# Altium PCB Zoom Camera Controller V2.0.PcbDoc
Units mil, origin at the board's own origin, x right, y up, seen from the top; angles counter-clockwise.
Board outline 1377.95 x 1377.95 mil, 2 copper layers (Top Layer, Bottom Layer); 22 components, 37 nets, 177 pads, 40 vias.
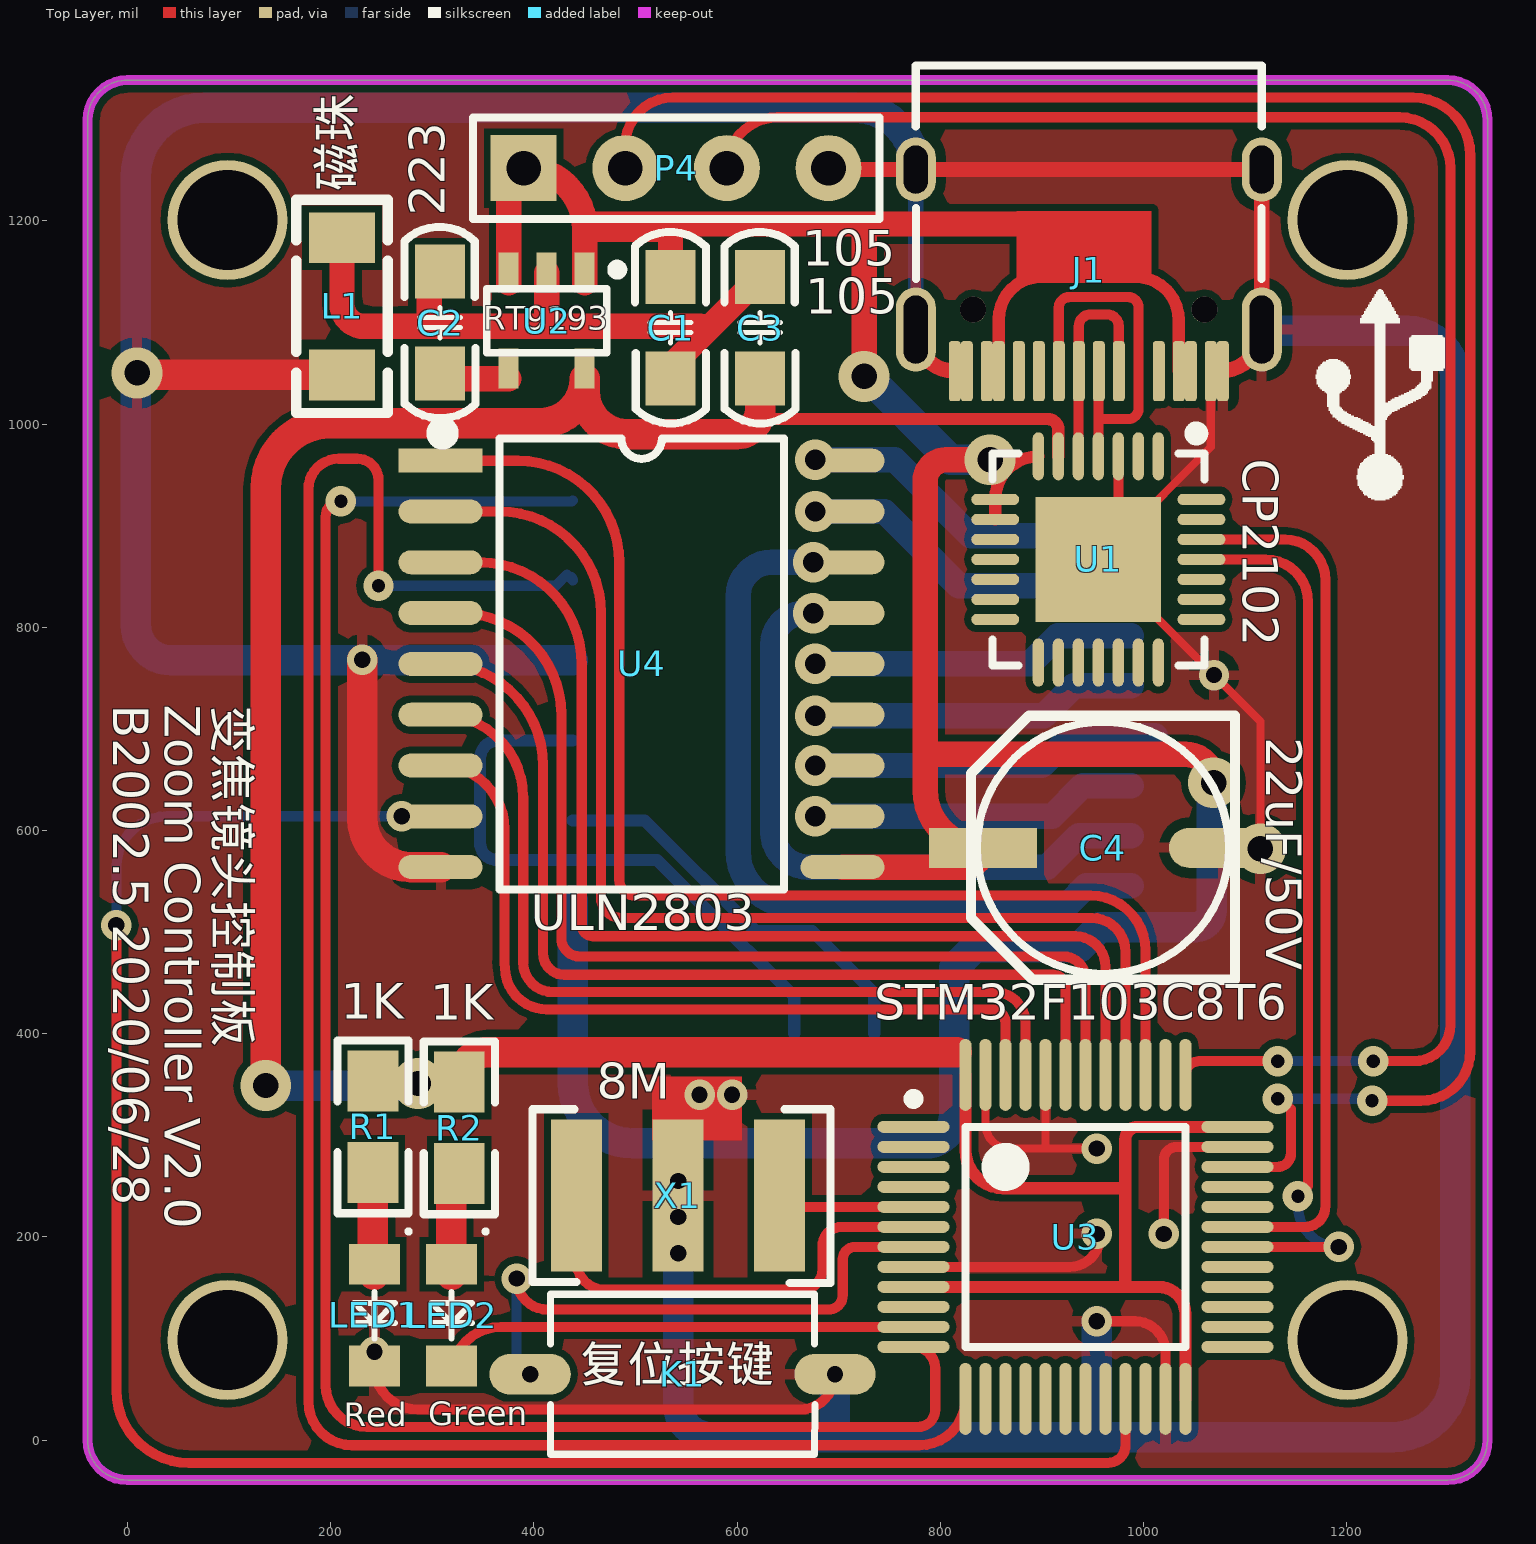
[diagram p0: Top Layer view]
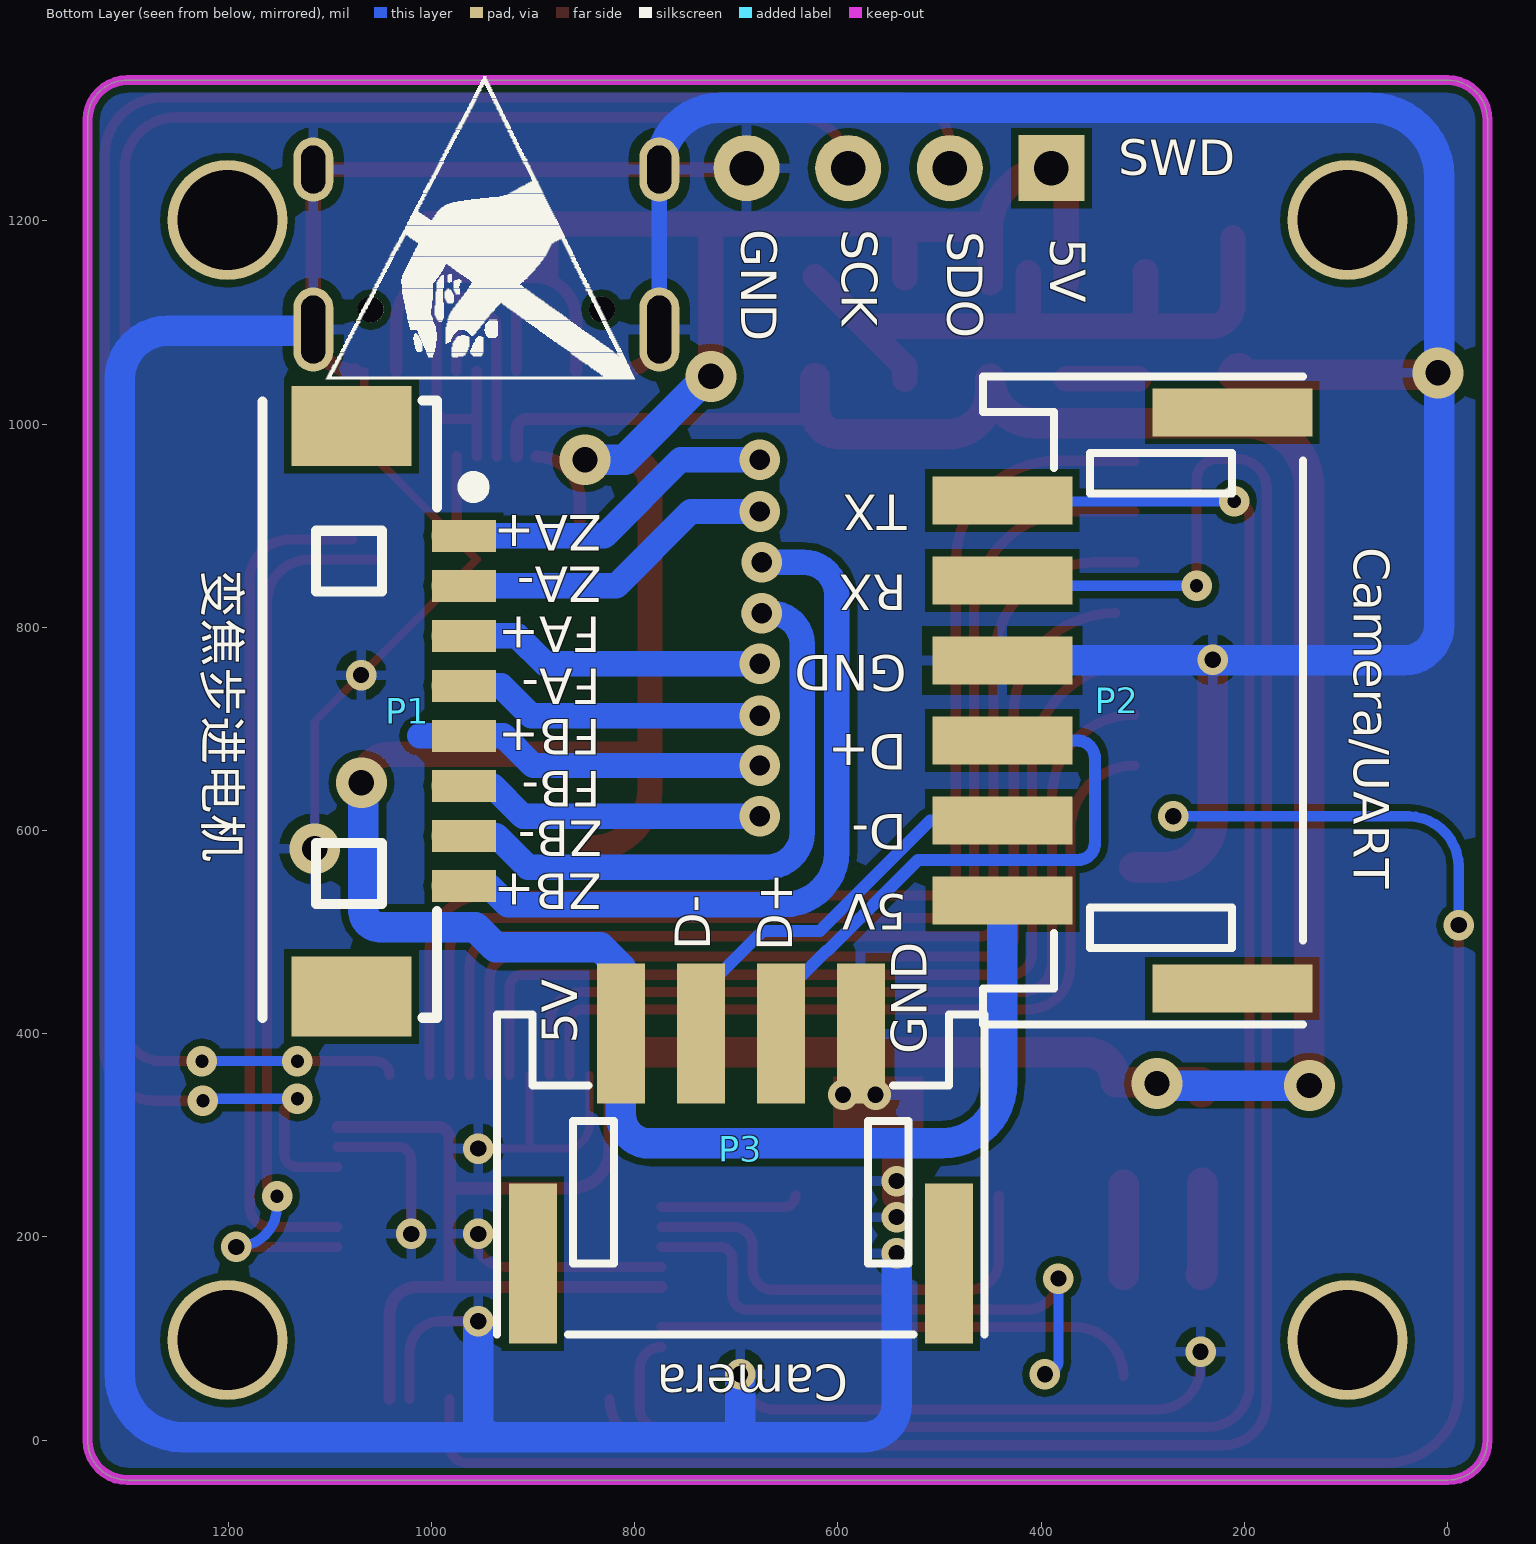
[diagram p1: Bottom Layer view, seen from below]
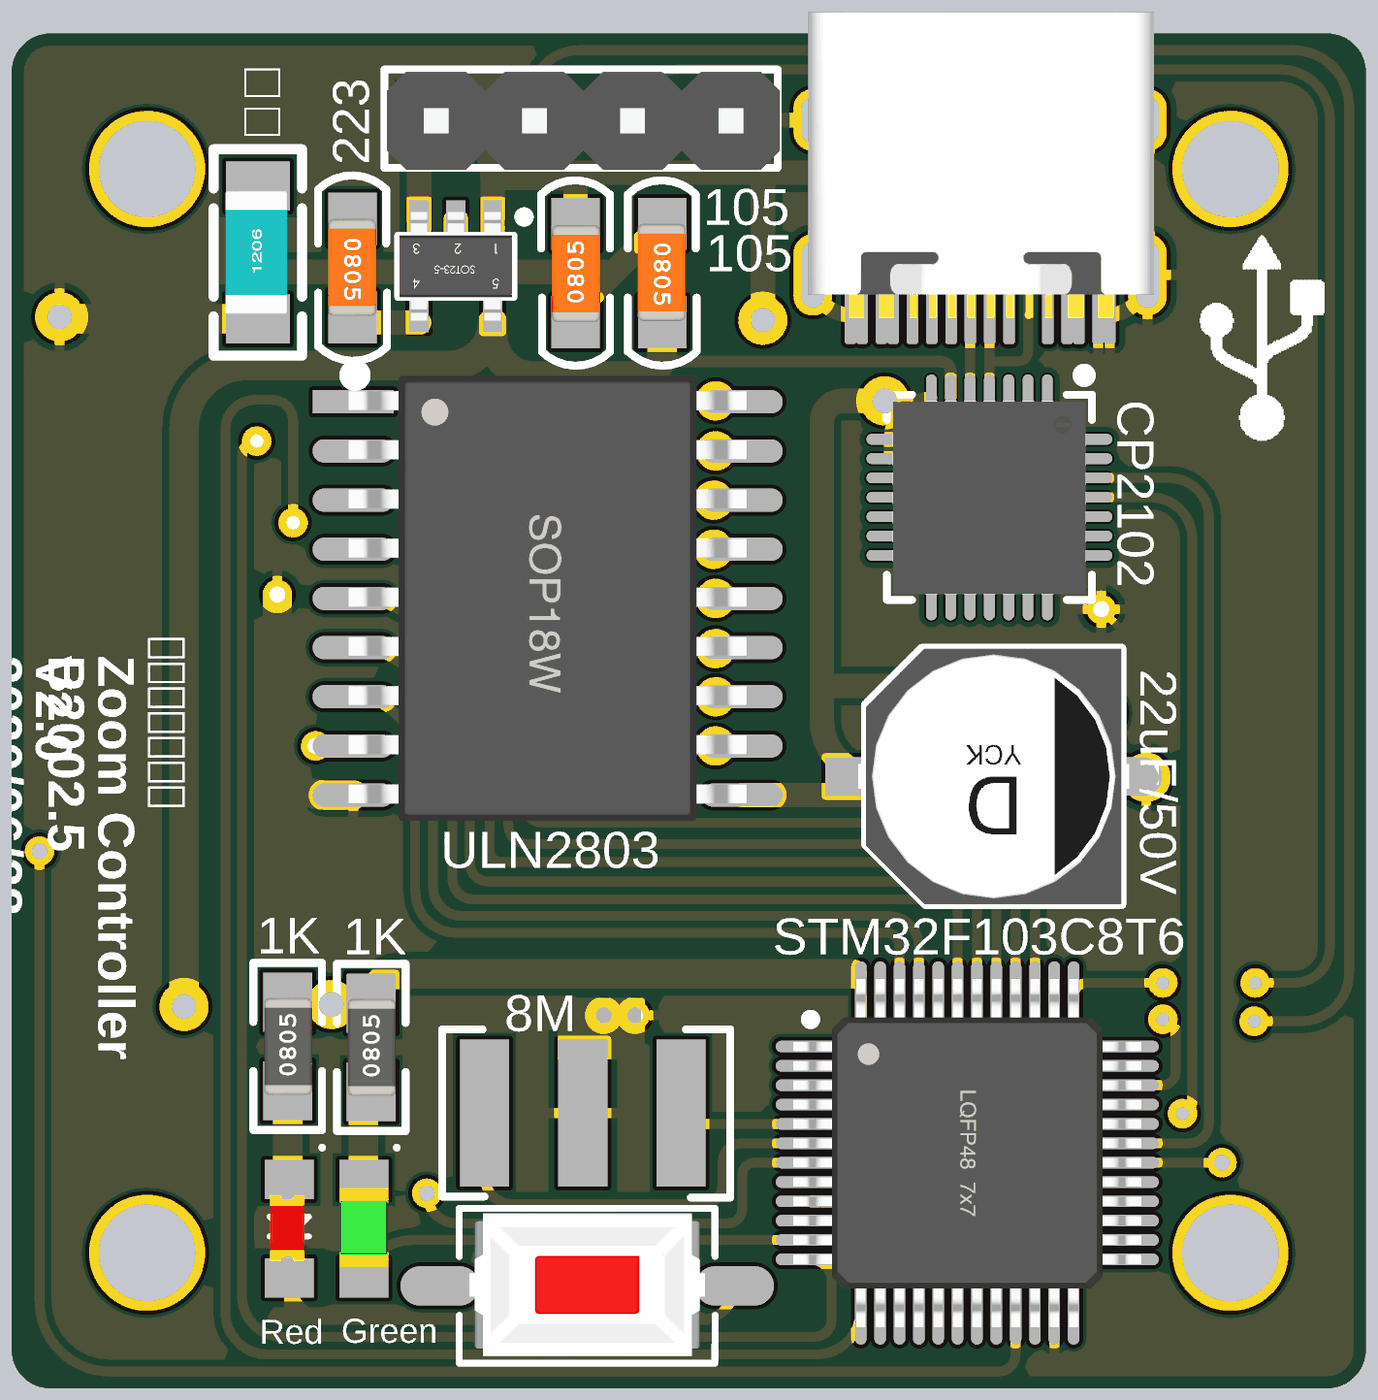
[diagram p2: 3D render of the assembled board from above, using the file's embedded part models]
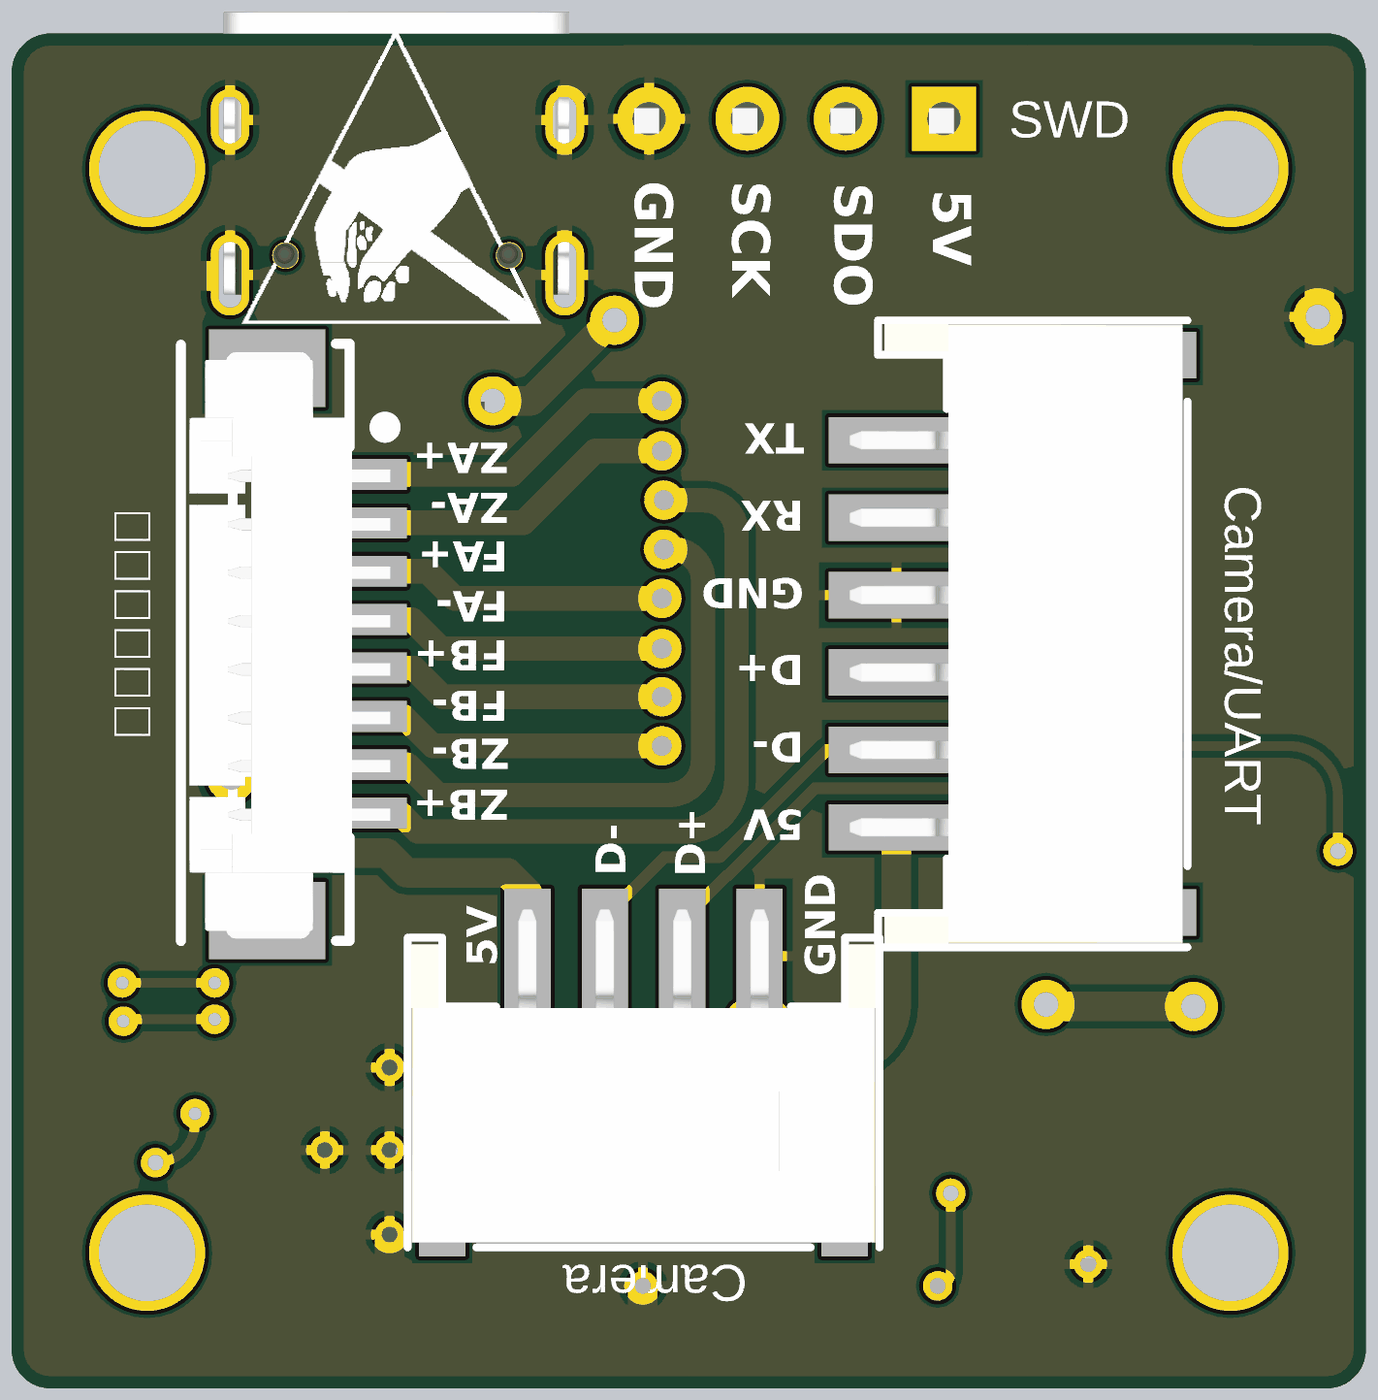
[diagram p3: 3D render of the assembled board from below, using the file's embedded part models]

## Layer stack, top to bottom
Top Solder: solder mask 0.4, Solder Resist, Dk 3.5
Top Layer: signal copper 1.4
Dielectric 1: dielectric 12.6, FR-4, Dk 4.8
Bottom Layer: signal copper 1.4
Bottom Solder: solder mask 0.4, Solder Resist, Dk 3.5

## Board outline
-39.37,0 -39.37,1299.21 cw(c0,1299.21) 0,1338.58 1299.21,1338.58 cw(c1299.21,1299.21) 1338.58,1299.21 1338.58,0 cw(c1299.21,0) 1299.21,-39.37 0,-39.37 cw(c0,0)

## Design rules (kind name [scope] priority, off if disabled: settings)
Clearance [All] p1: gap=7
ComponentClearance [All] p1: gap=0 collisioncheckmode=3 verticalgap=0 showdistances=FALSE
PolygonConnect [All] p1: connectstyle=Relief reliefconductorwidth=10 reliefentries=4 polygonreliefangle="90 Angle" airgapwidth=10
RoutingVias [All] p1: holewidth=28 width=50 viastyle="Through Hole" minholewidth=28 minwidth=50 maxholewidth=28 maxwidth=50
SolderMaskExpansion [All] p1: expansion=4
Width [All] p1: maxlimit=50 minlimit=8 preferedwidth=20
29 further rules are at their usual default settings.

## Components (designator, comment, footprint, x,y, rotation, side; value= is the part's Value field where it differs from the comment)
C1 "105" 0805C 530,1045.97 r90 top
C2 "223" 0805C 312,1149 r270 top
C3 "105" 0805C 627,1144 r270 top
C4 "22uF/50V" "CM D(6.3*5.4)" 959,583 r180 top
J1 "TypeC" "TYPE-C 16P" 940,1185 r90 top
K1 "复位按键" 贴片按键 402,62 r0 top
L1 "磁珠" 1206L 213,1050 r90 top
LED1 "Red" 0805LED(RED) 248,170 r270 top
LED2 "Green" 0805LED(GREEN) 321,171 r270 top
P1 "变焦步进电机" MX1.25WS-8P 1089,695 r90 bottom
P2 "Camera/UART" PH2.0WS-6P 305,738 r90 bottom
P3 "Camera" PH2.0WS-4P 686,251 r180 bottom locked
P4 "SWD" "Header 4" 389,1251 r90 top
R1 "1K" 0805R 242,257 r90 top
R2 "1K" 0805R 327,256 r90 top
U1 "CP2102" QFN-28 1031,942 r270 top
U2 "RT9193" SOT23-5 448,1151 r180 top
U3 "STM32F103C8T6" LQFP-48 935,200 r0 top locked
U4 "ULN2803" SOP18W_M 507,768 r0 top
X1 "8M" 三脚贴片8M晶振 642,243 r270 top
? "" LOGO_USB 1245,1028 r90 top
? "" LOGO_防静电 943,1192 r180 bottom

## Footprints (in the part's own frame and the unit in brackets; to place one, negate y for a bottom-side part, rotate by r counter-clockwise, add the part's x,y. Pads: shape width x height; smd on the part's side, far side on the other; paste and mask are expansions set on the pad)
0805C [mm]
  rect 1.35x1.25 smd: 1(-0.025,-0.112) 2(2.515,-0.112)
  silkscreen extent -1.15,-1 3.64,0.78, body extent -0.03,-0.75 2.48,0.5, height 0.79
0805LED(GREEN) [mil]
  rect 40x50 smd: 1(-2,-2) 2(98,-2)
  silkscreen extent -36,-22 71,33, body extent 7,-27 87,23, height 43
0805LED(RED) [mil]
  rect 40x50 smd: 1(-2.98,-4.95) 2(97.02,-4.95)
  silkscreen extent -37,-25 70,31, body extent 13,-25 80,11, height 35
0805R [mil]
  rect 60x50 smd: 1(6.34,0.5) 2(96.34,0.5)
  silkscreen extent -34,-34 136,36, body extent 2,-24 101,25, height 31
1206L [mil]
  rect 50x65 smd: 1(-1.59,1.89) 2(133.41,1.89)
  silkscreen extent -39,-43 171,47, body extent 3,-28 129,35, height 35
"CM D(6.3*5.4)" [mm] "贴片电解电容，直径6.3mm，高5.4mm"
  rect 2.7x1 smd: 1(2.975,0)
  oval 2.7x1 smd: 2(-3.025,0)
  silkscreen extent -3.33,-3.3 3.27,3.3, body extent -3.53,-3.3 3.47,3.3, height 5.4
"Header 4" [mil]
  rect 65x65 hole 34: 1(0.95,-0.93)
  round 65 hole 34: 2(0.95,-100.93) 3(0.95,-200.93) 4(0.95,-300.93)
  silkscreen extent -49,-351 51,49, body extent -51,-354 49,46, height 336
LOGO_USB [mil]
  silkscreen extent -103,-51 105,75
LOGO_防静电 [mil]
  silkscreen extent -161,-148 143,150
LQFP-48 [mm]
  oval 1.8x0.3 smd: 1(-4.101,2.75) 2(-4.101,2.25) 3(-4.101,1.75) 4(-4.101,1.25) 5(-4.101,0.75) 6(-4.101,0.25) 7(-4.101,-0.25) 8(-4.101,-0.75) 9(-4.101,-1.25) 10(-4.101,-1.75) 11(-4.101,-2.25) 12(-4.101,-2.75) 25(3.999,-2.75) 26(3.999,-2.25) 27(3.999,-1.75) 28(3.999,-1.25) 29(3.999,-0.75) 30(3.999,-0.25) 31(3.999,0.25) 32(3.999,0.75) 33(3.999,1.25) 34(3.999,1.75) 35(3.999,2.25) 36(3.999,2.75)
  oval 0.3x1.8 smd: 13(-2.801,-4.05) 14(-2.301,-4.05) 15(-1.801,-4.05) 16(-1.301,-4.05) 17(-0.801,-4.05) 18(-0.301,-4.05) 19(0.199,-4.05) 20(0.699,-4.05) 21(1.199,-4.05) 22(1.699,-4.05) 23(2.199,-4.05) 24(2.699,-4.05) 37(2.699,4.05) 38(2.199,4.05) 39(1.699,4.05) 40(1.199,4.05) 41(0.699,4.05) 42(0.199,4.05) 43(-0.301,4.05) 44(-0.801,4.05) 45(-1.301,4.05) 46(-1.801,4.05) 47(-2.301,4.05) 48(-2.801,4.05)
  silkscreen extent -4.23,-2.75 2.7,3.57, body extent -4.55,-4.5 4.45,4.5, height 1.45
MX1.25WS-8P [mm]
  rect 2x3 smd: 0(-6.564,-0.262) 0(7.7,-0.262)
  rect 0.8x1.6 smd: 1(4.956,-3.072) 2(3.706,-3.072) 3(2.456,-3.072) 4(1.206,-3.072) 5(-0.044,-3.072) 6(-1.294,-3.072) 7(-2.544,-3.072) 8(-3.794,-3.072)
  silkscreen extent -7.1,-3.51 8.33,1.97, body extent -7.03,-3.45 8.12,1.74, height 3.4
PH2.0WS-4P [mm]
  rect 1.2x4 smd: 0(-5.445,-1.962) 0(4.955,-1.962)
  rect 1.2x3.5 smd: 1(-3.245,3.788) 2(-1.245,3.788) 3(0.755,3.788) 4(2.755,3.788)
  silkscreen extent -6.34,-3.73 5.85,4.27, body extent -6.24,-3.61 5.76,4.99, height 5.55
PH2.0WS-6P [mm]
  rect 1.2x4 smd: 0(-7.453,-2.365) 0(6.947,-2.365)
  rect 1.2x3.5 smd: 1(-5.253,3.385) 2(-3.253,3.385) 3(-1.253,3.385) 4(0.747,3.385) 5(2.747,3.385) 6(4.747,3.385)
  silkscreen extent -8.35,-4.14 7.84,3.86, body extent -8.25,-4.01 7.75,4.59, height 5.55
QFN-28 [mm] "CP2102  USB转串口芯片"
  rect 3.13x3.13 smd mask+0.051: 0(1.909,-1.918)
  oval 1.2x0.28 smd mask+0.051: 1(-0.668,-0.418) 2(-0.668,-0.918) 3(-0.668,-1.418) 4(-0.668,-1.918) 5(-0.668,-2.418) 6(-0.668,-2.918) 7(-0.668,-3.418) 15(4.486,-3.418) 16(4.486,-2.918) 17(4.486,-2.418) 18(4.486,-1.918) 19(4.486,-1.418) 20(4.486,-0.918) 21(4.486,-0.418)
  oval 0.28x1.2 smd mask+0.051: 8(0.409,-4.495) 9(0.909,-4.495) 10(1.409,-4.495) 11(1.909,-4.495) 12(2.409,-4.495) 13(2.909,-4.495) 14(3.409,-4.495) 22(3.409,0.66) 23(2.909,0.66) 24(2.409,0.66) 25(1.909,0.66) 26(1.409,0.66) 27(0.909,0.66) 28(0.409,0.66)
  silkscreen extent -1.39,-4.57 4.56,0.73, body extent -0.58,-4.42 4.42,0.58, height 1
SOP18W_M [mm] "11.5*10.3*2.6mm（长宽高）"
  rect 2.1x0.6 smd: 1(-5.05,4.978)
  oval 2.1x0.6 smd: 2(-5.05,3.708) 3(-5.05,2.438) 4(-5.05,1.168) 5(-5.05,-0.102) 6(-5.05,-1.372) 7(-5.05,-2.642) 8(-5.05,-3.912) 9(-5.05,-5.182) 10(5,-5.182) 11(5,-3.912) 12(5,-2.642) 13(5,-1.372) 14(5,-0.102) 15(5,1.168) 16(5,2.438) 17(5,3.708) 18(5,4.978)
  silkscreen extent -5.16,-5.74 3.53,5.82, body extent -5.18,-5.85 5.13,5.65, height 2.7
SOT23-5 [mm]
  rect 0.5x1 smd: 1(-0.051,0.051) 2(0.899,0.051) 3(1.849,0.051) 4(1.849,2.451) 5(-0.051,2.451)
  silkscreen extent -0.99,-0.15 2.4,2.05, body extent -0.55,-0.15 2.35,2.65, height 1.09
"TYPE-C 16P" [mm] "贴片USB-3.1  4固定插脚"
  round 0.65 hole 0.65: 0(-1.834,2.735) 0(-1.834,-3.045)
  oval 1.6x1 hole 0.6 slot 1.2 at 0 deg: 1(1.666,4.17) 2(1.666,-4.48)
  oval 2.1x1 hole 0.6 slot 1.7 at 0 deg: 3(-2.334,-4.48) 4(-2.334,4.17)
  rrect50% 1.5x0.3 smd: A1(-3.374,-3.505) A4(-3.374,-2.705) A6(-3.374,-0.405) A7(-3.374,0.095) A8(-3.374,1.095) A9(-3.374,2.395) A12(-3.374,3.195) B1(-3.374,2.895) B4(-3.374,2.095) B5(-3.374,1.595) B6(-3.374,0.595) B7(-3.374,-0.905) B8(-3.374,-1.905) B9(-3.374,-2.405) B12(-3.374,-3.205)
  rrect50% 0x0 smd: A5(-3.374,-1.405)
  silkscreen extent -1.07,-4.48 4.27,4.17, body extent -3.45,-4.65 4.45,4.29, height 3.25
三脚贴片8M晶振 [mm] "CSTCC8M00G53-RO"
  rect 3.8x1.27 smd: 1(0.06,-0.006) 2(0.06,-5.086) 3(0.06,-2.546)
  silkscreen extent -2.1,-6.18 2.24,1.26, body extent -1.72,-6.23 1.84,1.26, height 1.5
贴片按键 [mil]
  oval 80x40 smd: 1(-5.71,2.8) 2(294.29,2.8)
  silkscreen extent 14,-76 274,82, body extent 24,-69 264,77, height 98

## Part data
C1 C2 C3: library part Cap1, "无极贴片电容"
C4: library part Cap3, "直插极性电容"
K1: library part 贴片按键, "轻触开关"
L1: library part L, "电感"
LED1 LED2: library part LED, "发光二极管"
P1: library part 接线端子-8PIN
P2: library part 接线端子-6PIN, "6PIN"
P3: library part 接线端子-4PIN, "4PIN"
P4: library part "Header 4", "排针"
R1 R2: library part Res, "电阻"
U1: "USB转串口芯片"
U3: "STM32单片机48引脚"
X1: library part XTAL三脚贴片晶振

## Free pads (board coordinates)
  round 118.11 hole 98.43: 0(98.43,98.43) 0(98.43,1200.79) 0(1200.79,98.43) 0(1200.79,1200.79)

## Via types
v1: diameter 30, hole 16, Top Layer to Bottom Layer, 18 vias
v2: diameter 40, hole 20, Top Layer to Bottom Layer, 8 vias
v3: diameter 50, hole 25, Top Layer to Bottom Layer, 7 vias
v4: diameter 30, hole 13, Top Layer to Bottom Layer, 7 vias

## Nets (pads, with @x,y where several pads share a name; then routed paths per layer and width w, separated by ;. In a path a pad name is that pad's centre, name@x,y a point inside that pad or via, vN(x,y) a via of type N, cw(c..) or ccw(c..) an arc to the next point about the centre after c; other vN are vias at no path point)
3.3V: C3.2 R1.2 R2.2 U1.6 U2.5 U3.9 U3.24 U3.36 U3.48 | length 3172.8
  Top Layer w10: 979,248 ccw(c979,251) 982,251
  Top Layer w12: 622.58,1009.95 ccw(c627.59,1009.95) 627.59,1004.94 906,1004.94 cw(c906,994.8) 916.13,994.8 U1.6 ; U3.9 982,150.79 ; U3.48 824.73,285.27 ccw(c862,285.27) 862,248 979,248 ; U3.24 1041.27,124.24 ccw(c1014.72,124.24) 1014.72,150.79 982,150.79 ; U3.36 994.27,308.27 ccw(c994.27,296) 982,296 982,251 982,150.79
  Top Layer w30: v3(136,349) 136,937 cw(c200,937) 200,1001 406.49,1001 ccw(c406.49,1044.51) 450,1044.51 450,1031.86 ccw(c491.86,1031.86) 491.86,990 599,990 ccw(c599,1013.58) 622.58,1013.58 C3.2 ; R1.2@241.5,343.34 ccw(c242.5,343.34) R1.2@242.5,342.34 ; R1.2@242.5,352.34 R2.2 cw(c356.16,352.34) 356.16,382 816,382
  Bottom Layer w30: v3(136,349) 284,349 ccw(c284,351) v3(286,351)
5.0V: C1.2 C4.1 J1.A4 J1.A9 J1.B4 J1.B9 P2.1 P3.1 P4.1 U1.7 U1.8 U1.9 U2.1 U2.3 U4.10 | length 3723.8
  Top Layer w12: U1.9 U1.8 cw(c896.45,925.9) U1.7 ; J1.B4 857.51,1103.05 cw(c899.46,1103.05) 899.46,1145 992.02,1145 cw(c992.02,1102.35) 1034.68,1102.35 J1.B9
  Top Layer w25: U2.3@375.2,1139 375.2,1237.22 cw(c389.93,1237.22) P4.1 cw(c389.93,1191.88) 450,1191.88 ; U2.1@450,1139 450,1191.88 ; C1.2@534.42,1144.02 534.42,1188.3 cw(c538,1188.3) 538,1191.88 450,1191.88 ; U4.10 822.89,564 ccw(c822.89,583) C4.1 cw(c841.89,639.89) 785,639.89 785,675 ; v3@725,1037 v3(725,1047) 725,1197 ; v3(849,965) 806,965 ccw(c806,944) 785,944 785,675 ; 963,1197 725,1197 ; v3(1069,647) ccw(c1041,647) 1041,675 785,675 ; 450,1191.88 cw(c455.12,1191.88) 455.12,1197 725,1197
  Bottom Layer w25: v3(725,1047) v3@728,1047
  Bottom Layer w30: P2.1 438.27,351.73 ccw(c498,351.73) 498,292 785.28,292 ccw(c785.28,320.46) 813.74,320.46 P3.1 813.74,464.74 834,485 937,485 957,505 1051,505 ccw(c1051,521) 1067,521 1067,643 cw(c1068,643) v3@1068,644 ; v3@728,1047 810,965 v3(849,965)
CP_USB_D+: J1.A6 J1.B6 U1.4 | length 382
  Top Layer w10: J1.B6 916.57,1114.57 cw(c927,1114.57) 927,1125 985,1125 cw(c985,1115) 995,1115 995,1015 cw(c985,1015) 985,1005 955.5,1005 ; U1.4 955.5,1005 ; J1.A6 955.5,1052.16 955.5,1005
CP_USB_D-: J1.A7 J1.B7 U1.5 | length 225.3
  Top Layer w10: U1.5 935.82,1052.16 J1.A7 936.25,1096.25 cw(c948,1096.25) 948,1108 964,1108 cw(c964,1096.38) 975.62,1096.38 J1.B7
DGND: C4.2 J1.1 J1.2 J1.3 J1.4 J1.A1 J1.A12 J1.B1 J1.B12 K1.2 L1.1 LED1.2 P2.4 P3.4 P4.4 U1.0 U1.3 U3.8 U3.23 U3.35 U3.44 U3.47 U4.9 X1.3 | length 7378.9
  Top Layer w8: U3.47 844.42,310.9 ccw(c868.32,310.9) 868.32,287 v1@955,287 ; 903.47,290.53 U3.44 ; J1.B12 1066.17,977.51 975.19,886.53 U1.0 v1(1069.35,753) 1115,707.35 v3(1115,582)
  Top Layer w10: LED1.2 ccw(c286.03,72.98) 286.03,30 661.5,30 ccw(c661.5,64.8) v1(696.29,64.8) ; U3.8 927.2,170.47 ccw(c927.2,200.27) v1@957,200.27 ; v1(954,117) 991.47,117 cw(c991.47,86.89) 1021.58,86.89 U3.23 ; U1.0@975.19,886.53 U1.3 ; v1(1020,203) 1020,276 cw(c1032.58,276) 1032.58,288.58 U3.35
  Top Layer w15: P4.4 ccw(c691.3,1251.95) 691.3,1250.58 J1.1 J1.2 J1.3 cw(c1075.43,1093.1) J1.A1@1075.43,1052.16 ; J1.4 775.82,1078.82 ccw(c778.71,1078.82) 778.71,1075.94 ccw(c814.2,1090.54) J1.A12
  Top Layer w30: v3@7,1048.41 L1.1 ccw(c204.52,1048.41) L1.1@204.52,1055 ; v1(231,768) 231,612 ccw(c279,612) 279,564 U4.9 ; X1.3 X1.3@541.76,300.76
  Bottom Layer w15: J1.4 J1.1
  Bottom Layer w30: P2.4 43.41,767.41 cw(c43.41,802.82) 8,802.82 8,1243 cw(c76.58,1243) 76.58,1311.58 714.82,1311.58 cw(c714.82,1250.58) J1.1 ; v1(542,184) 542,35.25 ccw(c574.25,35.25) 574.25,3 701,3 ; v1(696.29,64.8) 696.29,7.71 ccw(c701,7.71) 701,3 ; v1(954,117) 954,20 cw(c937,20) 937,3 ; J1.3 ccw(c1117.47,1093.1) 1117.47,1092 1259,1092 cw(c1259,1044) 1307,1044 1307,65 cw(c1245,65) 1245,3 937,3 ; 701,3 937,3
  other v1: 243.05,87.05 954,203 542,219.5 542,255 954,287 563,340 595,340
  other v3: 9.41,1050.41
FOCUS_A+: P1.3 U4.14 | length 323.5
  Bottom Layer w25: v2@676,764 888,764 915.71,791.71 P1.3@988.04,791.71
  other v2: 677,764
FOCUS_A-: P1.4 U4.13 | length 323.3
  Bottom Layer w25: v2(677,713) 902,713 931.5,742.5 P1.4@988.04,742.5
FOCUS_B+: P1.5 U4.12 | length 350.8
  Bottom Layer w25: v2@673,664 900,664 929.28,693.28 988.04,693.28 1011.72,693.28
  other v2: 677,664
FOCUS_B-: P1.6 U4.11 | length 323.5
  Bottom Layer w25: v2(677,614) 910,614 940.07,644.07 P1.6@988.04,644.07
GND: C1.1 C2.1 C3.1 L1.2 U2.2 | length 684.9
  Top Layer w25: L1.2 211.11,1118.09 ccw(c233,1118.09) 233,1096.2 297,1096.2 ; C2.1@297.58,1149.98 297,1149.98 297,1096.2 ; U2.2 412.6,1099.6 ccw(c416,1099.6) 416,1096.2 ; C1.1@534.42,1044.02 534.42,1056.83 568.8,1091.2 ; C3.1 568.8,1091.2 ; 297,1096.2 416,1096.2 ; 416,1096.2 563.8,1096.2 cw(c563.8,1091.2) 568.8,1091.2
IN1: U3.39 U4.1 | length 1225.5
  Top Layer w10: U4.1 384,964 cw(c384,864) 484,864 484,551.66 ccw(c499.66,551.66) 499.66,536 947.9,536 cw(c947.9,482) 1001.9,482 U3.39
IN2: U3.40 U4.2 | length 1162.8
  Top Layer w10: U4.2 366,914 cw(c366,814) 466,814 466,534 ccw(c486,534) 486,514 948.95,514 cw(c948.95,480.74) 982.21,480.74 U3.40
IN3: U3.41 U4.3 | length 1098.5
  Top Layer w10: U4.3 347,864 cw(c347,764) 447,764 447,507 ccw(c458,507) 458,496 932.74,496 cw(c932.74,466.21) 962.53,466.21 U3.41
IN4: U3.42 U4.4 | length 1010.5
  Top Layer w10: U4.4@327,814 cw(c327,714) 427,714 427,494 ccw(c445,494) 445,476 921.2,476 cw(c921.2,454.36) 942.84,454.36 U3.42
IN5: U3.43 U4.5 | length 962.4
  Top Layer w10: U4.5 309,764 cw(c309,664) 409,664 409,479 ccw(c430,479) 430,458 911,458 cw(c911,445.84) 923.16,445.84 U3.43
IN6: U3.45 U4.6 | length 869.7
  Top Layer w10: U4.6 cw(c308.17,632.76) 389.4,632.76 389.4,470.22 ccw(c418.63,470.22) 418.63,441 853.26,441 cw(c853.26,410.47) 883.79,410.47 U3.45
IN7: U3.46 U4.7 | length 809.8
  Top Layer w10: U4.7 cw(c308.17,601.17) 371,601.17 371,472.49 ccw(c423.49,472.49) 371.55,464.93 ccw(c412.48,464.93) 397.76,426.74 ccw(c412.48,464.93) 412.48,424 851,424 cw(c851,410.9) 864.1,410.9 U3.46
IN8: U3.21 U4.8 | length 1921.1
  Top Layer w10: v1@-16,507 v1@-16,514 ; v1(-11,507) -11,49 ccw(c60.37,49) 60.37,-22.37 965,-22.37 ccw(c965,-5.16) 982.21,-5.16 U3.21
  Bottom Layer w10: v1(-11,507) -11,564.27 cw(c38.73,564.27) 38.73,614 v1(270,614)
NetC2_2: C2.2 U2.4 | length 71.1
  Top Layer w25: C2.2@304.11,1044.51 U2.4@375.2,1044.51
NetLED1_1: LED1.1 R1.1 | length 91.2
  Top Layer w30: R1.1@241.5,253.34 241.5,164.53 ccw(c243.05,164.53) LED1.1@243.05,162.98
NetLED2_1: LED2.1 R2.1 | length 88.8
  Top Layer w30: R2.1@318.5,251.34 318.5,163 LED2.1@319,163
NRST: K1.1 U3.7 | length 560.2
  Top Layer w10: v1(383,159) ccw(c413.58,159) 413.58,128.42 689.73,128.42 ccw(c689.73,142.69) 704,142.69 704,178 cw(c716.16,178) 716.16,190.16 U3.7
  Bottom Layer w10: v1(383,159) 383,78.09 ccw(c396.29,78.09) v1(396.29,64.8)
OSCIN: U3.5 X1.1 | length 138.1
  Top Layer w10: X1.1 ccw(c652.87,240.64) 652.87,229.53 U3.5
OSCOUT: U3.6 X1.2 | length 457.5
  Top Layer w10: X1.2 441.76,176.24 ccw(c470,176.24) 470,148 664,148 ccw(c664,168) 684,168 684,191 cw(c702.84,191) 702.84,209.84 U3.6
STM32_RXD1: U1.26 U3.31 | length 838.4
  Top Layer w10: U1.26@1077.98,886.53 1138.93,886.53 cw(c1138.93,846.45) 1179,846.45 1179,230.08 cw(c1158.76,230.08) 1158.76,209.84 U3.31
STM32_RXD2: P2.5 U3.13 | length 2001.7
  Top Layer w10: v4(247,841) 247,945 ccw(c226,945) 226,966 208,966 ccw(c208,936) 178,936 178,37.96 ccw(c221,37.96) 221,-5.04 779.14,-5.04 ccw(c779.14,40.55) U3.13
  Bottom Layer w10: v4(247,841) 421.42,841 432.42,852 P2.5 ccw(c434.42,846.15) P2.5@434.42,850
STM32_TXD1: U1.25 U3.30 | length 890.5
  Top Layer w10: U1.25 1120.16,866.84 cw(c1120.16,825) 1162,825 1162,250 v4(1152,240) ; U3.30 v1(1192.16,190.16)
  Bottom Layer w10: v4(1152,240) 1152,230.32 ccw(c1192.16,230.32) v1(1192.16,190.16)
STM32_TXD2: P2.6 U3.12 | length 1814.4
  Top Layer w10: v4(210,924) ccw(c210,909) 195,909 195,54 ccw(c236,54) 236,13 778,13 ccw(c778,30) 795,30 795,70.28 ccw(c773.55,70.28) U3.12
  Bottom Layer w10: v4(210,924) 437.16,924 438.16,925 P2.6
SWCLK(A14): P4.3 U3.37 | length 1901.3
  Top Layer w10: P4.3 cw(c639.98,1251.95) 639.98,1302 1252,1302 cw(c1252,1252) 1302,1252 1302,408.86 cw(c1266.14,408.86) 1266.14,373 v4(1226,373) ; U3.37 cw(c1054.82,359.45) 1054.82,373 v4(1132,373)
  Bottom Layer w10: v4(1132,373) v4(1226,373)
SWDIO(A13): P4.2 U3.34 | length 2121.3
  Top Layer w10: P4.2 489.93,1274.5 cw(c537.01,1274.5) 537.01,1321.58 1265,1321.58 cw(c1265,1265) 1321.58,1265 1321.58,382.83 cw(c1272.75,382.83) 1272.75,334 v4(1225,334) ; U3.34 1131.9,268.9 ccw(c1131.9,282) 1145,282 1145,326
  Bottom Layer w10: v4@1134,334 cw(c1134,336) v4(1132,336) 1223,336 cw(c1223,334) v4(1225,334)
SYS_LED(A1): LED2.2 U3.11 | length 482.2
  Top Layer w10: LED2.2@319,63 cw(c367.42,63) 367.42,111.42 U3.11
USB_DM: P2.2 P3.2 | length 407
  Bottom Layer w12: P2.2 509.07,609.93 617.99,501.01 673.99,501.01 735,440 P3.2
USB_DP: P2.3 P3.3 | length 595.4
  Bottom Layer w12: P2.3 364.97,688.67 ccw(c364.97,670.7) 347,670.7 347,588 ccw(c364,588) 364,571 521.13,571 610.12,482.01 610.99,482.01 656.26,436.74 P3.3
ZOOM_A+: P1.1 U4.18 | length 344
  Bottom Layer w25: v2@675,965 v2(677,965) 755,965 829.87,890.13 P1.1@988.04,890.13
ZOOM_A-: P1.2 U4.17 | length 342.3
  Bottom Layer w25: v2@676,914 745,914 818.08,840.92 P1.2@988.04,840.92
  other v2: 677,914
ZOOM_B+: P1.8 U4.16 | length 770.1
  Bottom Layer w25: v2@674.05,863.99 cw(c675,790) v2(675,864) 634,864 ccw(c634,831) 601,831 601,579.35 ccw(c653.35,579.35) 653.35,527 925,527 943.65,545.65 P1.8@988.04,545.65
ZOOM_B-: P1.7 U4.15 | length 635.5
  Bottom Layer w25: v2@683,814 v2(675,814) 666,814 ccw(c666,783) 635,783 635,599 ccw(c670,599) 670,564 905.25,564 936.11,594.86 P1.7@988.04,594.86
pads on no net: J1.0 J1.A5 J1.A8 J1.B5 J1.B8 P1.0 P2.0 P3.0 U1.1 U1.2 U1.10 U1.11 U1.12 U1.13 U1.14 U1.15 U1.16 U1.17 U1.18 U1.19 U1.20 U1.21 U1.22 U1.23 U1.24 U1.27 U1.28 U3.1 U3.2 U3.3 U3.4 U3.10 U3.14 U3.15 U3.16 U3.17 U3.18 U3.19 U3.20 U3.22 U3.25 U3.26 U3.27 U3.28 U3.29 U3.32 U3.33 U3.38

## Polygon pours and split planes (outlines as drawn)
DGND on Bottom Layer "Top Layer-No Net" (solid, remove dead copper, pour order 12): -107,954 -107,1283 cw(c-9,1283) -9,1381 1330,1381 cw(c1330,1281) 1430,1281 1430,982 1430,-31 cw(c1330,-31) 1330,-131 1234,-131 -12,-131 cw(c-12,-31) -112,-31 -112,148
DGND on Top Layer "Top Layer-No Net" (solid, remove dead copper, pour order 14): -120,1102 -120,1291 cw(c-20,1291) -20,1391 26,1391 1315,1391 cw(c1315,1291) 1415,1291 1415,1097 1415,-39 cw(c1315,-39) 1315,-139 1209,-139 -10,-139 cw(c-10,-39) -110,-39 -110,72

## Keep-outs
Keep-Out Layer:
  the board outline again, w10

## Other copper
Top Layer:
  region net DGND: 605,358 516,358 516,295 605,295
  region net 5.0V: 1008,1210 875,1210 875,1142 1008,1142

## Silkscreen, mask and mechanical layers (free items; w line width, h text height)
Top Overlay:
  text "B2002.5 2020/06/28" at -26,724.02 h60 r270
  text "Zoom Controller V2.0" at 24.86,724.02 h60 r270
  text "变焦镜头控制板" at 75,724.02 h60 r270
Bottom Overlay:
  text "SCK" at 608,1192 h60 r90
  text "GND" at 707,1192 h60 r90
  text "SDO" at 504,1190 h60 r90
  text "5V" at 403,1183 h60 r90
  text "TX" at 532.42,942.07 h60 r180
  text "ZA+" at 832.67,922.28 h60 r180
  text "ZA-" at 832.67,871.28 h60 r180
  text "RX" at 532.42,863.55 h60 r180
  text "FA+" at 833.67,822.28 h60 r180
  text "GND" at 532.42,784.58 h60 r180
  text "FA-" at 833.67,771.28 h60 r180
  text "FB+" at 833.67,721.28 h60 r180
  text "D+" at 532.42,706.49 h60 r180
  text "FB-" at 833.67,670.28 h60 r180
  text "D-" at 532.42,627.97 h60 r180
  text "ZB-" at 831.67,621.28 h60 r180
  text "ZB+" at 832.67,569.28 h60 r180
  text "5V" at 532.48,549 h60 r180
  text "D-" at 714,482 h60 r270
  text "D+" at 633,481 h60 r270
  text "5V" at 845,390 h60 r270
  text "GND" at 501,380 h60 r270